# EAGLE board riffleito-CTD-REVA (EAGLE 6.5.0)
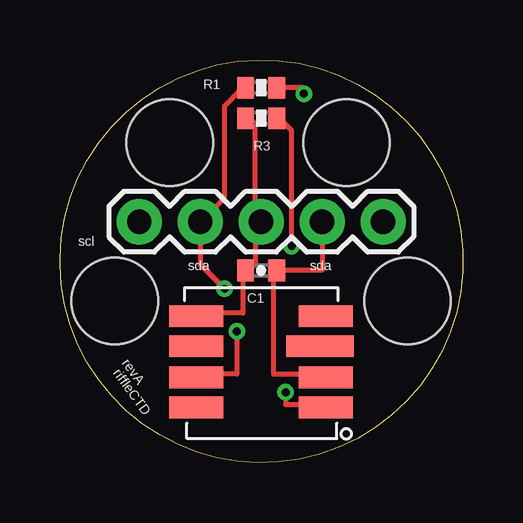
[diagram p0: board, top side]
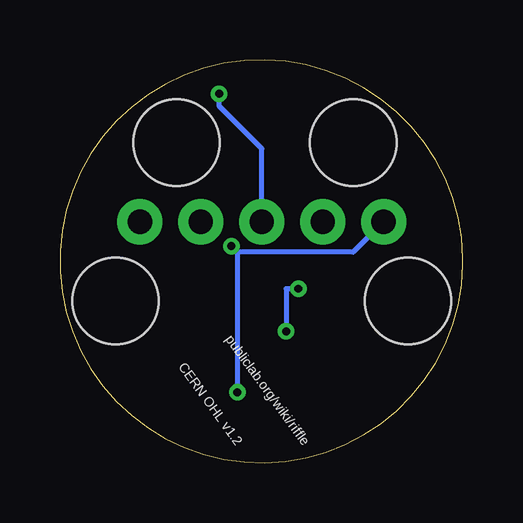
[diagram p1: board, bottom side, seen from below]

Size 16.79 x 16.8 mm. Coordinates in mm from the lower left corner, seen from the top.
Outline: 0,8.53 arc-358 0,8.27 0,8.53
Copper layers (1*16): Top 0.0356mm / dielectric 1.5011mm / Bottom 0.0356mm
Design rules "LaenPCBOrder": minimum track width 6mil, minimum drill 13mil, track to track 6mil, track to pad 6mil, pad to pad 6mil, via to via 6mil, smd to smd 6mil, copper to edge 15mil, drill to drill 6mil, minimum pad ring 7mil, minimum via ring 7mil, stop-mask expansion 3mil, vias tented up to drill 0mil, thermal gap 10mil
Net classes: 0 default: width 0.203 mm, drill 0.33 mm, clearance 0.203 mm; 1 power: width 0.381 mm, drill 0.33 mm, clearance 0.254 mm
Holes 3.6 mm at 2.29,6.75 14.48,6.75 4.57,13.35 11.94,13.35

## Footprints (pad centres in the part's own frame; a part is rotated, then mirrored left to right if it is on the bottom)
0402-CAP = smd 0.7 x 0.9: 1 -0.65,0; 2 0.65,0
1X05 = drill 1.016 pad 1.88: 1 0,0; 2 2.54,0; 3 5.08,0; 4 7.62,0; 5 10.16,0
MS5803-14BA = smd 2.8 x 0.9: CSB 2.45,0.65 | smd 2.25 x 0.9: GND 2.7,-0.65; NC 2.7,1.9; PS -2.7,0.65; SCLK 2.7,-1.9; SDA -2.7,-0.65; SDO -2.7,-1.9; VDD -2.7,1.9
0402-RES = smd 0.7 x 0.9: 1 -0.65,0; 2 0.65,0

## Placement (x,y rotation side)
C1  100 nF  [0402-CAP]  8.38,8.02 0 top
JP2  [1X05]  3.3,10.05 0 top
MS5803  MS5803-14BA  [MS5803-14BA]  8.38,4.21 0 top
R1  10K  [0402-RES]  8.38,14.37 0 top
R3  10K  [0402-RES]  8.38,15.64 180 top

## Library data of the parts
C1 R1 R3 = SparkFun
JP2 = SparkFun-Connectors
MS5803 = Vic's Library

## Nets
+3V3: C1.1 JP2.3 MS5803.VDD R1.1 R3.1
A0: JP2.5
GND: C1.2 JP2.4 MS5803.GND
SCL: JP2.1 MS5803.SCLK R1.2
SDA: JP2.2 MS5803.SDA R3.2

## Tracks (layer width: path | path; a pad name or v marks a point on that pad's centre or on a via)
+3V3  (via drill 0.33)
  Top 0.203: 8.13,9.8 8.13,8.27 7.87,8.02 C1.1 7.62,8.02 7.62,6.24 5.84,6.24 MS5803.VDD | 8.13,9.8 8.13,14.11 7.87,14.37 R1.1 | 8.13,9.8 JP2.3 | R3.1 10.16,15.64 v10.16,15.38
  Bottom 0.203: v10.16,15.38 10.16,14.88 8.38,13.1 JP2.3
GND
  Top 0.203: JP2.4 10.92,8.02 C1.2 8.89,8.02 8.89,3.7 10.92,3.7 MS5803.GND
SCL  (via drill 0.33)
  Top 0.203: v9.65,9.03 9.65,13.86 9.14,14.37 R1.2 | v9.4,2.94 9.4,2.43 10.92,2.43 MS5803.SCLK
  Bottom 0.203: 9.4,8.78 v9.65,9.03 | 9.4,8.78 4.57,8.78 JP2.1 | 9.4,8.78 v9.4,2.94
SDA  (via drill 0.33)
  Top 0.203: R3.2 7.62,15.64 6.86,14.88 6.86,11.07 JP2.2 5.84,8.27 v6.86,7.26 | v7.37,5.48 7.37,3.7 5.84,3.7 MS5803.SDA
  Bottom 0.203: v7.37,5.48 7.37,7.26 v6.86,7.26

## Text on the board
tPlace: scl | sda | sda | revA | riffleCTD
bPlace: publiclab.org/wiki/riffle | CERN OHL v1.2